# Altium PCB sumo.PcbDoc (part 1 of 2)
Units mm, origin at the board's own origin, x right, y up, seen from the top; angles counter-clockwise.
Board outline 100 x 100 mm, 2 copper layers (Top Layer, Bottom Layer); 167 components, 120 nets, 498 pads, 1066 vias.
Unrouted connection lines stored in the file: 60.
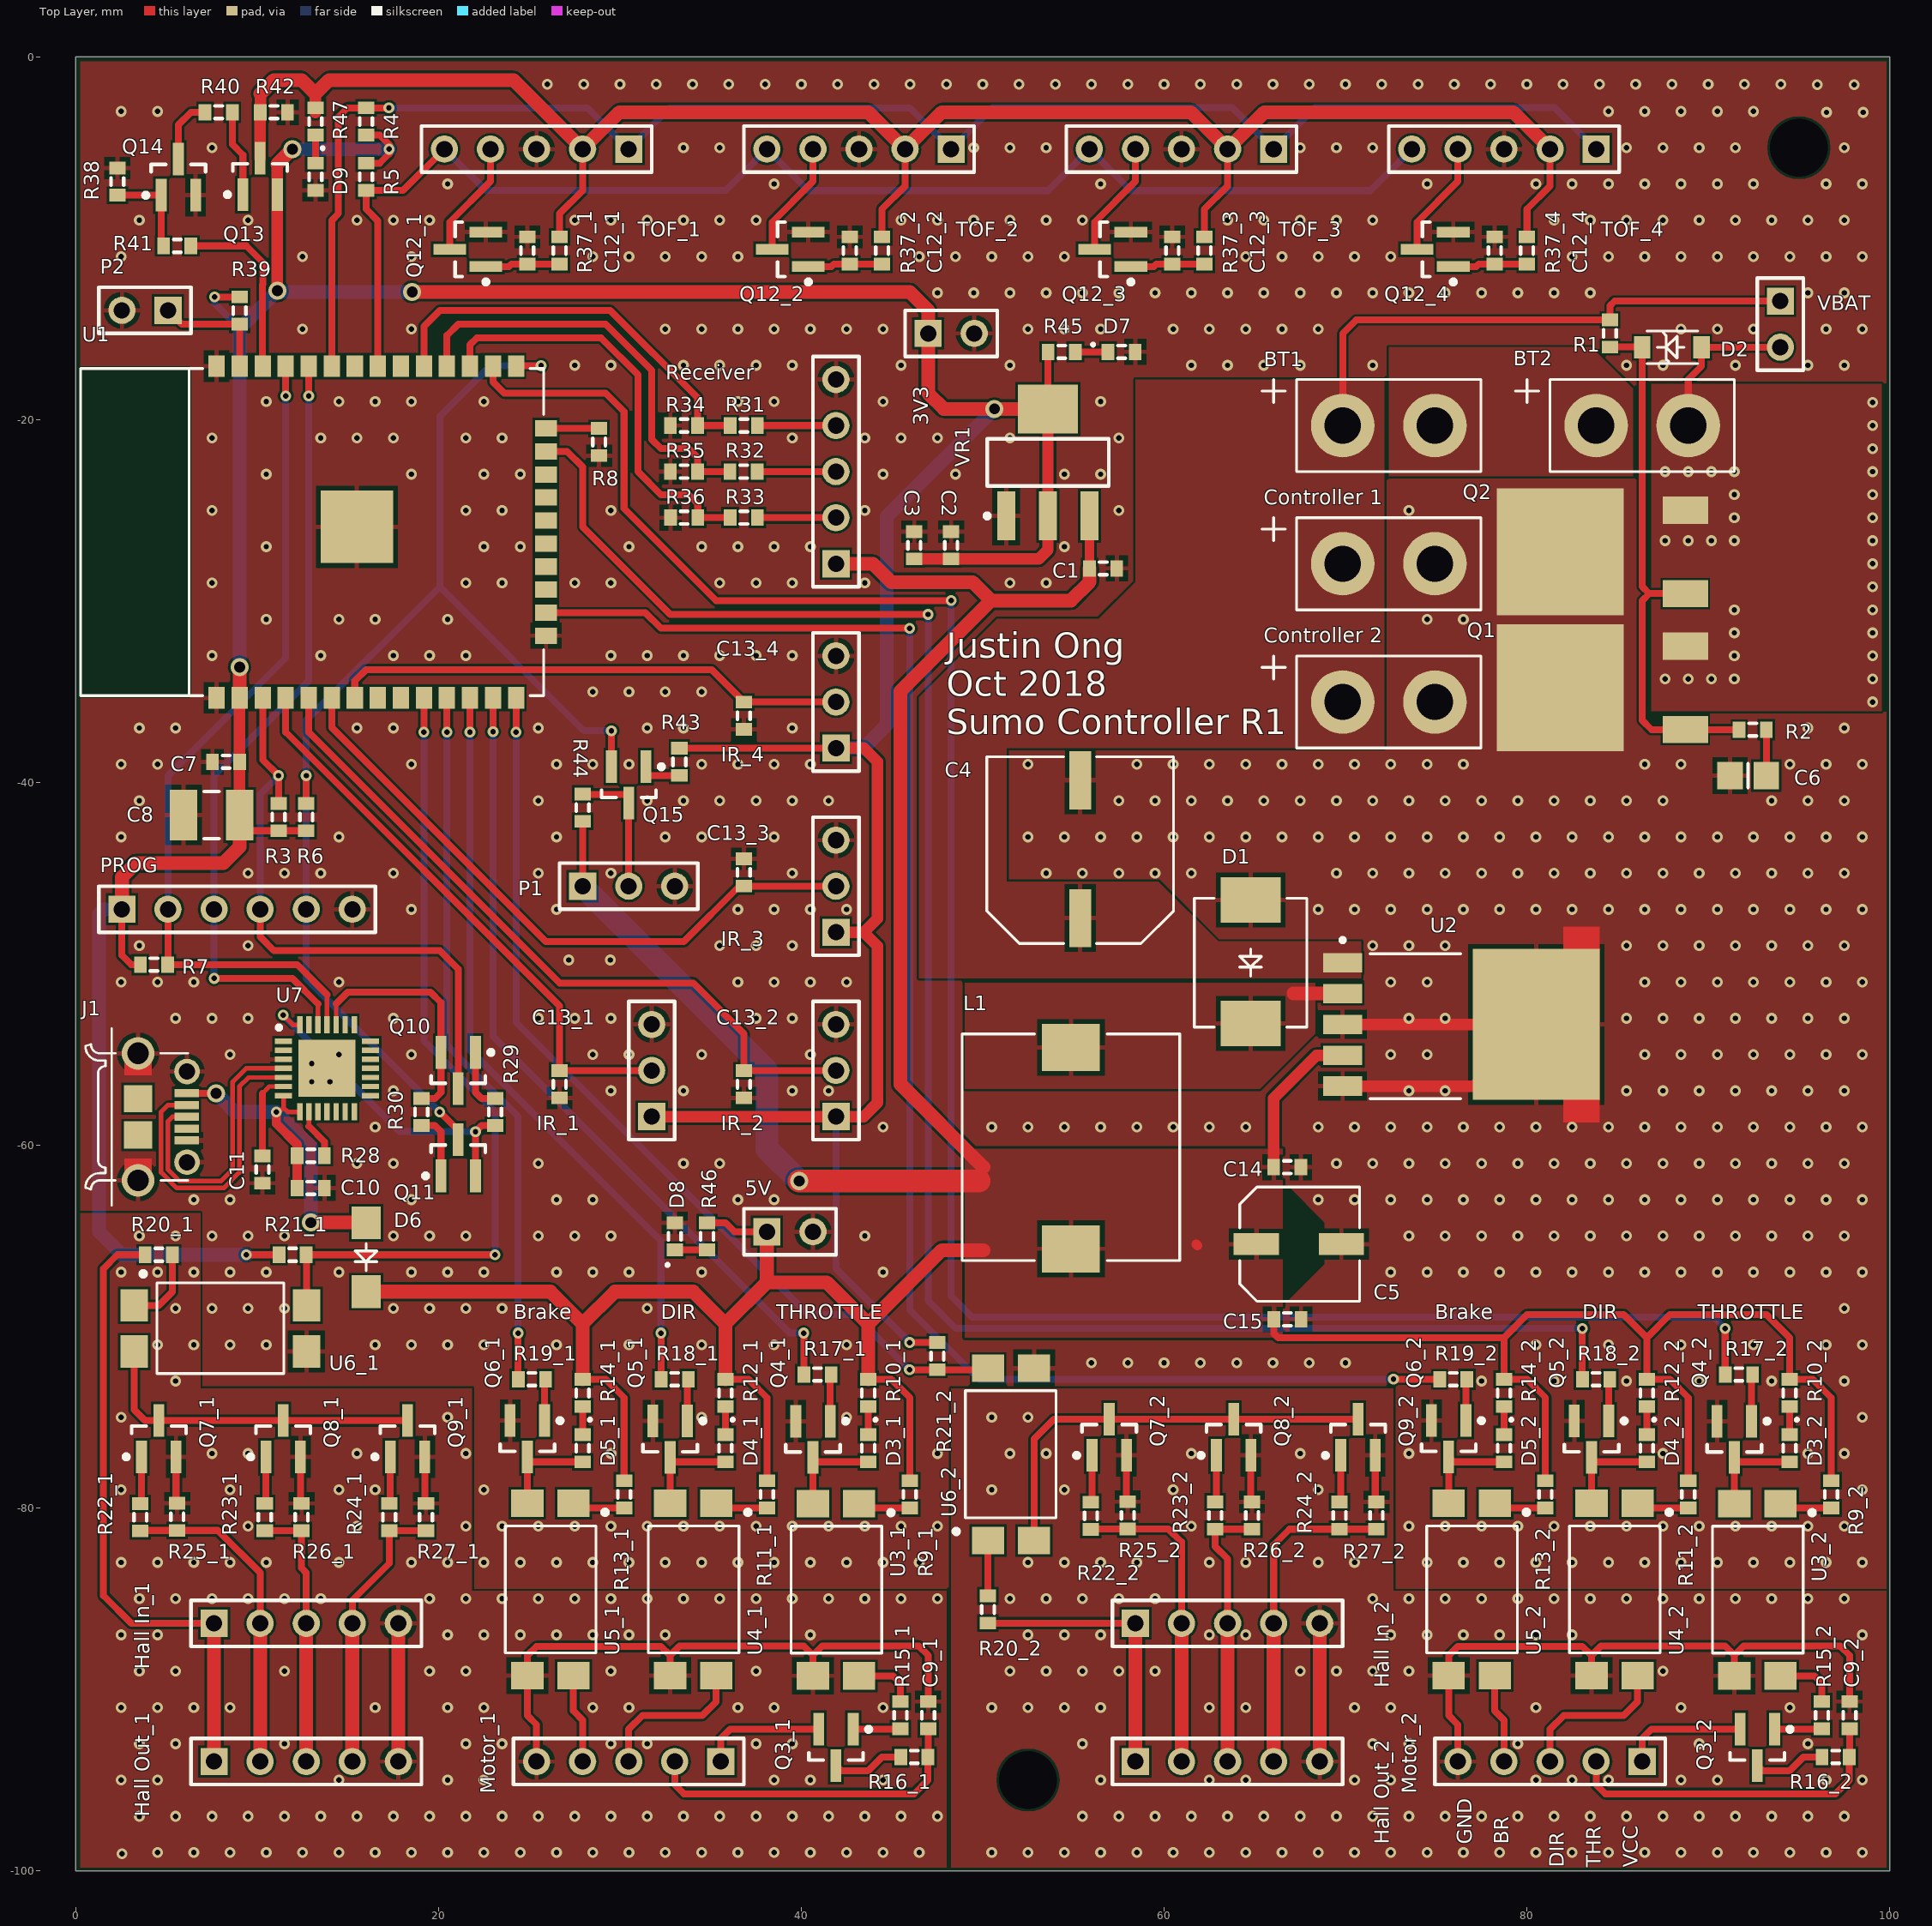
[diagram p0: Top Layer view]
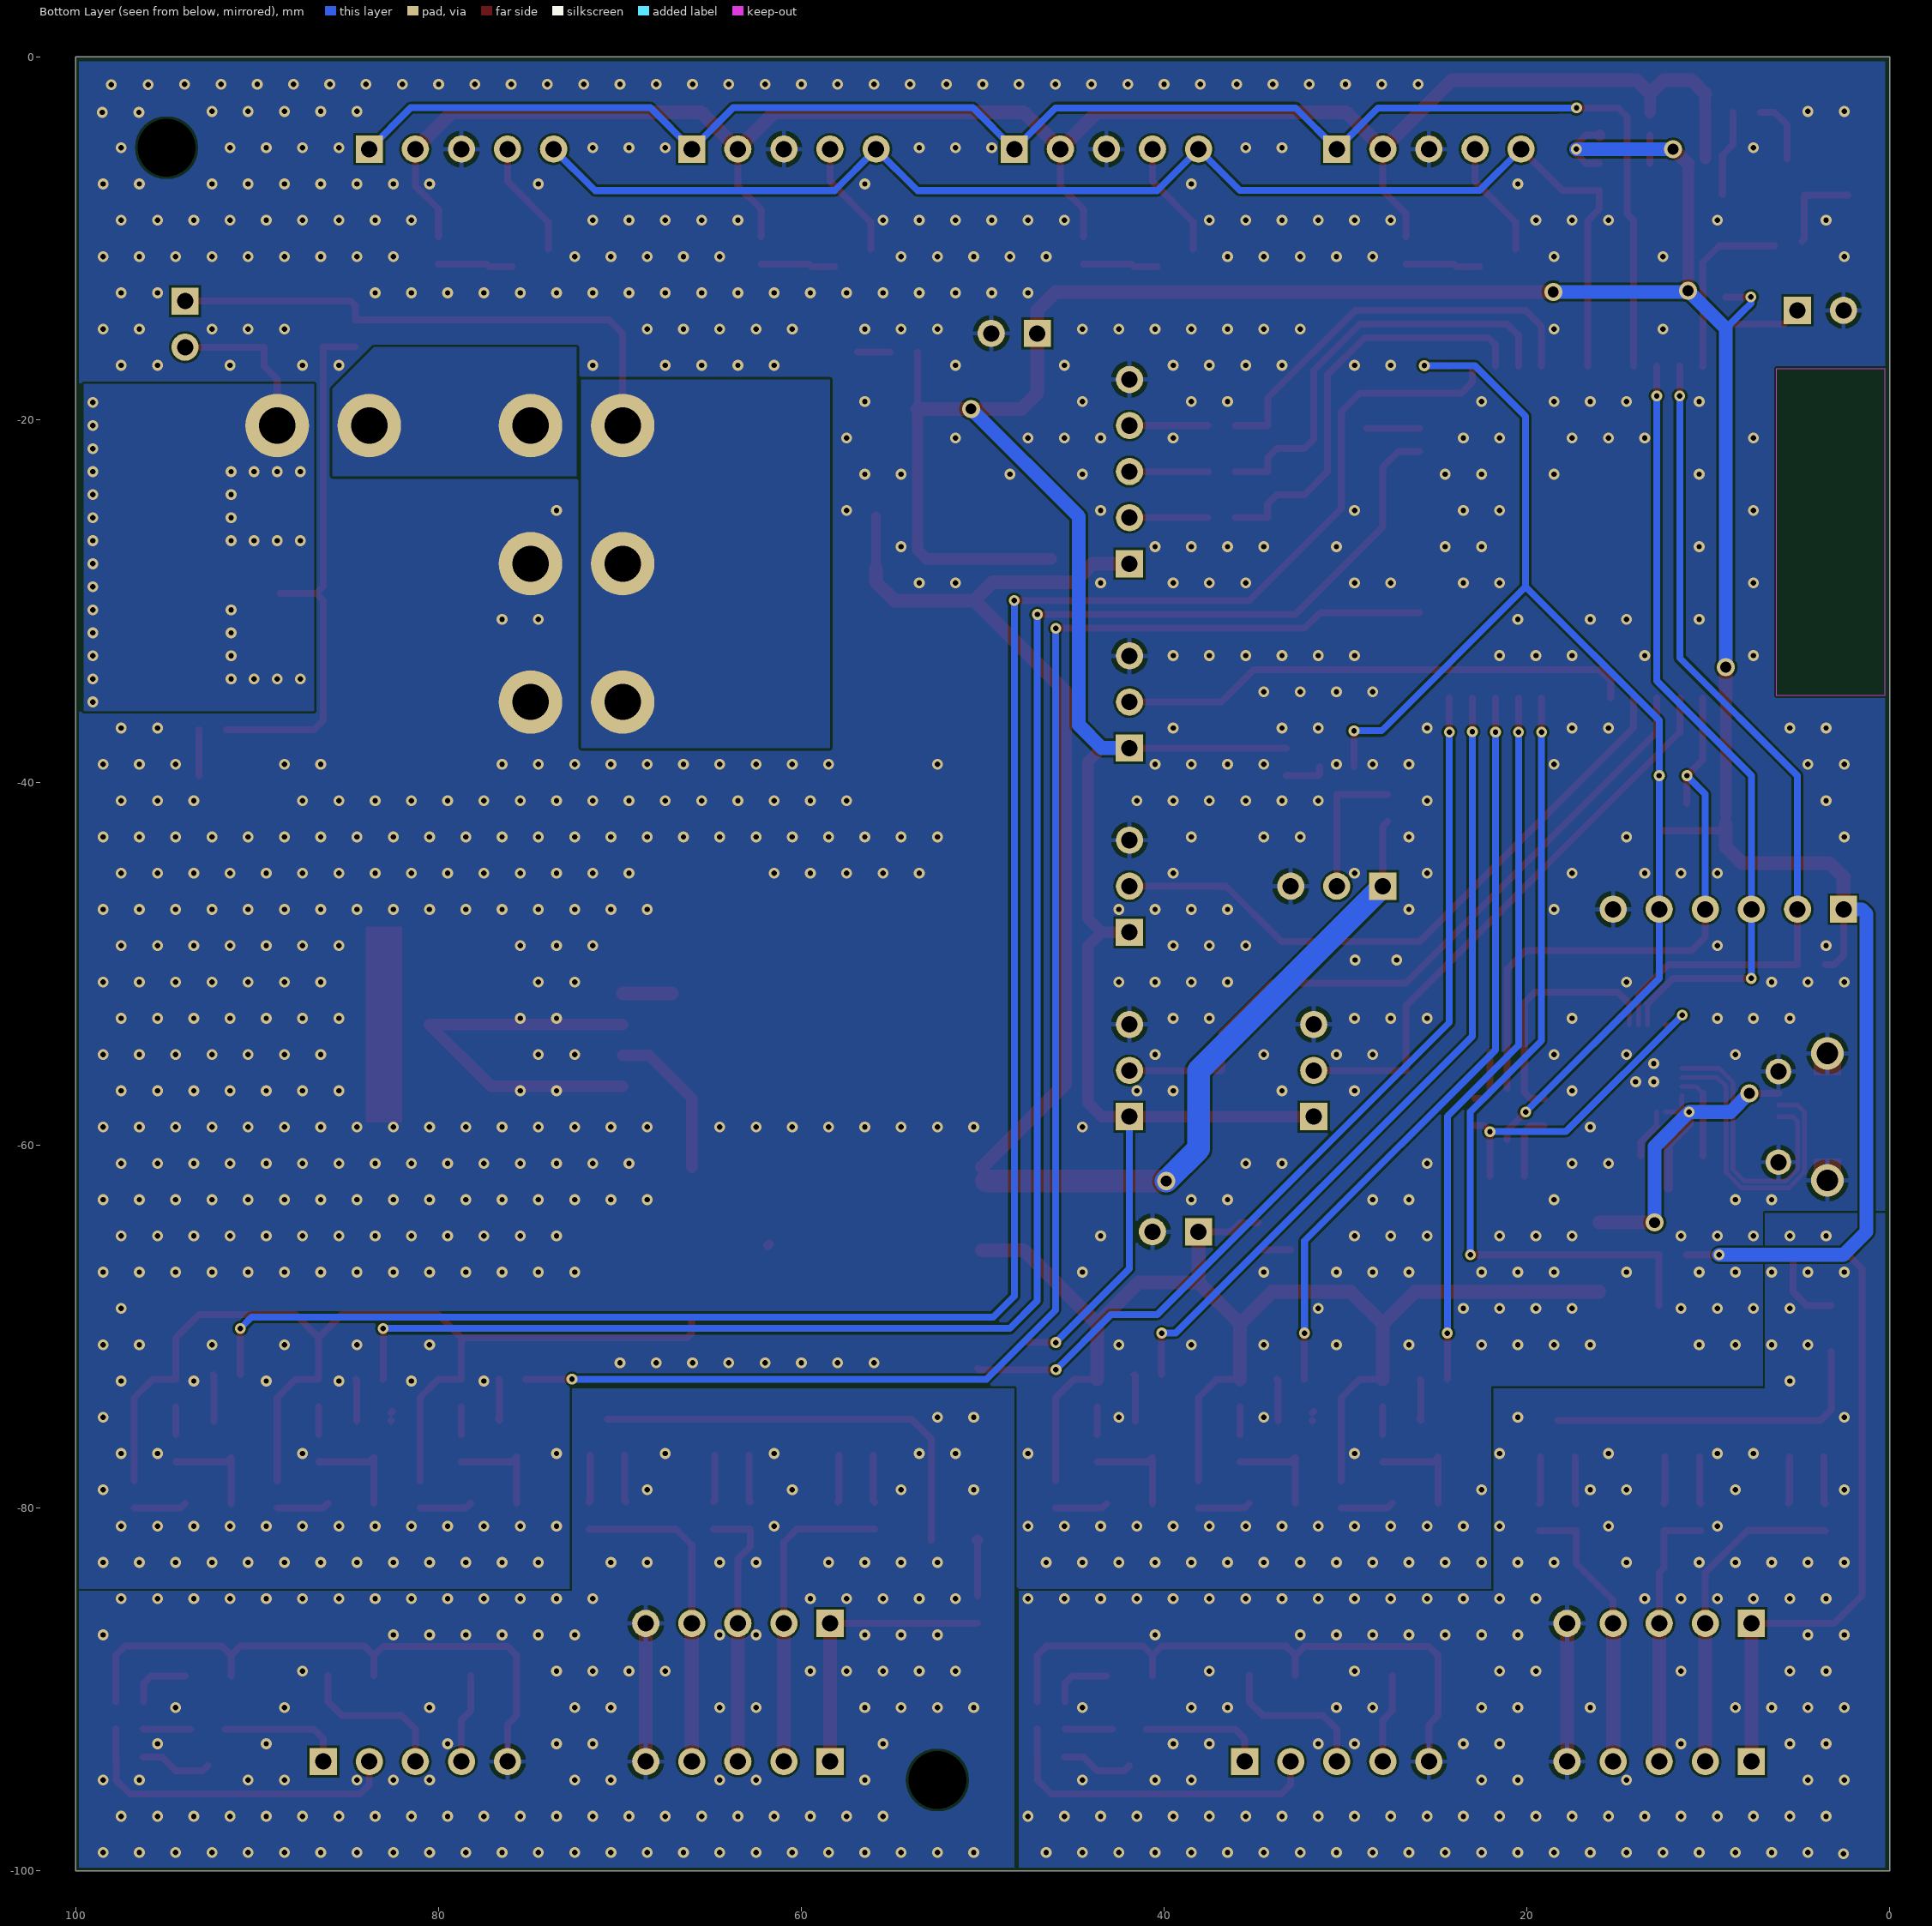
[diagram p1: Bottom Layer view, seen from below]

## Layer stack, top to bottom
Top Solder: solder mask 0.0102, Solder Resist, Dk 3.5
Top Layer: signal copper 0.0356
Dielectric 1: dielectric 0.32, FR-4, Dk 4.8
Bottom Layer: signal copper 0.0356
Bottom Solder: solder mask 0.0102, Solder Resist, Dk 3.5

## Board outline
0,-100 100,-100 100,0 0,0

## Design rules (kind name [scope] priority, off if disabled: settings)
Clearance [All] p1: gap=0.127 ignorepadtopadclearanceinfootprint=FALSE
PlaneConnect [All] p1: planeconnectstyle=Relief reliefexpansion=0.508 reliefentries=4 reliefconductorwidth=0.508 reliefairgap=0.254
PolygonConnect PolygonConnect_Ignore_Stitching [IsStitchingVia OR (IsVia AND InNet('GND_1'))] p1: connectstyle=Direct reliefconductorwidth=0.254 reliefentries=4 polygonreliefangle="90 Angle" airgapwidth=0.254
PolygonConnect PolygonConnect_Direct_Pads [(InComponent('BT1') OR InComponent('BT2') OR InComponent('Controller 1') OR InComponent('Controller 2') OR InComponent('Q1') OR InComponent('Q2') OR InNet('NetBT2_2') OR (InNet('VBAT') AND NOT InComponent('C4'))) vs NOT InComponent('C4')] p2: connectstyle=Direct reliefconductorwidth=0.508 reliefentries=4 polygonreliefangle="90 Angle" airgapwidth=0.254
PolygonConnect PolygonConnect_1 [All] p3: connectstyle=Relief reliefconductorwidth=0.254 reliefentries=4 polygonreliefangle="90 Angle" airgapwidth=0.254
RoomDefinition IR4 [InComponentClass('IR4')] p1: confinementstyle=ConfineIn formatcopy=TRUE lockcomponents=FALSE outline 34.29,-40.64 44.45,-40.64 44.45,-30.48 34.29,-30.48
RoomDefinition IR3 [InComponentClass('IR3')] p2: confinementstyle=ConfineIn formatcopy=TRUE lockcomponents=FALSE outline 34.29,-50.8 44.45,-50.8 44.45,-40.64 34.29,-40.64
RoomDefinition IR2 [InComponentClass('IR2')] p3: confinementstyle=ConfineIn formatcopy=TRUE lockcomponents=FALSE outline 34.29,-60.96 44.45,-60.96 44.45,-50.8 34.29,-50.8
RoomDefinition IR1 [InComponentClass('IR1')] p4: confinementstyle=ConfineIn formatcopy=TRUE lockcomponents=FALSE outline 24.13,-60.96 34.29,-60.96 34.29,-50.8 24.13,-50.8
RoomDefinition "WS2812B Driver" [InComponentClass('WS2812B Driver')] p5: confinementstyle=ConfineIn formatcopy=TRUE lockcomponents=FALSE outline 35.56,-35.56 25.4,-35.56 25.4,-48.26 35.56,-48.26
RoomDefinition VL53L0X_D [InComponentClass('VL53L0X_D')] p6: confinementstyle=ConfineIn formatcopy=TRUE lockcomponents=FALSE outline 86.36,-15.24 86.36,-2.54 71.12,-2.54 71.12,-15.24
RoomDefinition VL53L0X_C [InComponentClass('VL53L0X_C')] p7: confinementstyle=ConfineIn formatcopy=TRUE lockcomponents=FALSE outline 68.58,-15.24 68.58,-2.54 53.34,-2.54 53.34,-15.24
RoomDefinition VL53L0X_B [InComponentClass('VL53L0X_B')] p8: confinementstyle=ConfineIn formatcopy=TRUE lockcomponents=FALSE outline 50.8,-15.24 50.8,-2.54 35.56,-2.54 35.56,-15.24
RoomDefinition VL53L0X_A [InComponentClass('VL53L0X_A')] p9: confinementstyle=ConfineIn formatcopy=TRUE lockcomponents=FALSE outline 33.02,-15.24 33.02,-2.54 17.78,-2.54 17.78,-15.24
RoomDefinition "TOF Sensor Control" [InComponentClass('TOF Sensor Control')] p10: confinementstyle=ConfineIn formatcopy=TRUE lockcomponents=FALSE outline 0,-11.43 17.78,-11.43 17.78,0 0,0
RoomDefinition Receiver [InComponentClass('Receiver')] p11: confinementstyle=ConfineIn formatcopy=TRUE lockcomponents=FALSE outline 30.48,-30.48 44.45,-30.48 44.45,-15.24 30.48,-15.24
RoomDefinition Programming [InComponentClass('Programming')] p12: confinementstyle=ConfineIn formatcopy=TRUE lockcomponents=FALSE outline 0.064,-70.612 25.4,-70.612 25.4,-50.927 0.064,-50.927
RoomDefinition "Motor 2" [InComponentClass('Motor 2')] p13: confinementstyle=ConfineIn formatcopy=TRUE lockcomponents=FALSE outline 44.45,-99.06 99.06,-99.06 99.06,-63.5 44.45,-63.5
RoomDefinition "Motor 1" [InComponentClass('Motor 1')] p14: confinementstyle=ConfineIn formatcopy=TRUE lockcomponents=FALSE outline 0,-99.06 48.26,-99.06 48.26,-63.5 0,-63.5
RoomDefinition ESP32 [InComponentClass('ESP32')] p15: confinementstyle=ConfineIn formatcopy=TRUE lockcomponents=FALSE outline -0.054,-50.673 31.242,-50.673 31.242,0 -0.054,0
RoomDefinition BatteryStepDownHV [InComponentClass('BatteryStepDownHV')] p16: confinementstyle=ConfineIn formatcopy=TRUE lockcomponents=FALSE outline 31.496,-73.152 99.568,-73.152 99.568,-10.922 31.496,-10.922
RoomDefinition "3V3 Step Down" [InComponentClass('3V3 Step Down')] p17: confinementstyle=ConfineIn formatcopy=TRUE lockcomponents=FALSE outline 44.45,-29.464 62.23,-29.464 62.23,-12.954 44.45,-12.954
RoutingVias [All] p1: holewidth=0.2 width=0.6 viastyle="Through Hole" minholewidth=0.2 minwidth=0.6 maxholewidth=1 maxwidth=2
SolderMaskExpansion [All] p1: expansion=0.102
Width [All] p1: maxlimit=25.4 minlimit=0.254 preferedwidth=0.381
29 further rules are at their usual default settings.

## Classes and differential pairs
channel class IR: IR1 IR2 IR3 IR4
component class IR4: C13_4 IR_4
component class IR3: C13_3 IR_3
component class IR2: C13_2 IR_2
component class IR1: C13_1 IR_1
channel class TOFSensor: VL53L0X_A VL53L0X_B VL53L0X_C VL53L0X_D
channel class MotorDriver: "Motor 1" "Motor 2"
component class "WS2812B Driver": P1 Q15 R43 R44
component class VL53L0X_D: C12_4 Q12_4 R37_4 TOF_4
component class VL53L0X_C: C12_3 Q12_3 R37_3 TOF_3
component class VL53L0X_B: C12_2 Q12_2 R37_2 TOF_2
component class VL53L0X_A: C12_1 Q12_1 R37_1 TOF_1
component class "TOF Sensor Control": D9 Q13 Q14 R38 R40 R41 R42 R47
component class Receiver: R31 R32 R33 R34 R35 R36 Receiver
component class Programming: C10 C11 D6 J1 Q10 Q11 R28 R29 R30 U7
component class "Motor 2": C9_2 D3_2 D4_2 D5_2 "Hall In_2" "Hall Out_2" Motor_2 Q3_2 Q4_2 Q5_2 Q6_2 Q7_2 Q8_2 Q9_2 R9_2 R10_2 R11_2 R12_2 R13_2 R14_2 R15_2 R16_2 R17_2 R18_2 R19_2 R20_2 R21_2 R22_2 R23_2 R24_2 R25_2 R26_2 R27_2 U3_2 U4_2 U5_2 U6_2
component class "Motor 1": C9_1 D3_1 D4_1 D5_1 "Hall In_1" "Hall Out_1" Motor_1 Q3_1 Q4_1 Q5_1 Q6_1 Q7_1 Q8_1 Q9_1 R9_1 R10_1 R11_1 R12_1 R13_1 R14_1 R15_1 R16_1 R17_1 R18_1 R19_1 R20_1 R21_1 R22_1 R23_1 R24_1 R25_1 R26_1 R27_1 U3_1 U4_1 U5_1 U6_1
component class ESP32: C7 C8 P2 PROG R3 R4 R5 R6 R7 R8 R39 U1
component class BatteryStepDownHV: 5V BT1 BT2 C4 C5 C6 C14 C15 "Controller 1" "Controller 2" D1 D2 D8 L1 Q1 Q2 R1 R2 R46 U2 VBAT
component class "3V3 Step Down": 3V3 C1 C2 C3 D7 R45 VR1

## Components (designator, comment, footprint, x,y, rotation, side; value= is the part's Value field where it differs from the comment)
3V3 "Header 2" HDR1X2 46.99,-15.24 r0 top
5V "Header 2" HDR1X2 38.1,-64.77 r0 top
BT1 "6S Li-Po" "Wire Terminals" 69.85,-20.32 r0 top
BT2 "6S Li-Po" "Wire Terminals" 83.82,-20.32 r0 top
C1 "Cap" J1-0603 56.642,-28.194 r0 top value=22uF
C2 "Cap" J1-0603 48.26,-26.924 r270 top value=100nF
C3 "Cap" J1-0603 46.228,-26.924 r90 top value=22uF
C4 "Cap Pol1" 10x10.5 55.372,-47.478 r90 top value=100uF
C5 "Cap Pol1" 6.3X5.4 65.074,-65.456 r0 top value=220uF
C6 "Cap" 6-0805_M 92.202,-39.624 r0 top value=1uF
C7 "Cap" J1-0603 8.28,-38.862 r0 top value=100nF
C8 "Cap" C1210_M 7.48,-41.796 r0 top value=100uF
C9_1 "Cap" J1-0603 46.99,-91.424 r270 top value=100nF (schematic designator C9)
C9_2 "Cap" J1-0603 97.79,-91.424 r270 top value=100nF (schematic designator C9)
C10 "Cap" J1-0603 12.954,-62.357 r180 top value=100nF
C11 "Cap" J1-0603 10.287,-61.341 r90 top value=100nF
C12_1 "Cap" J1-0603 26.67,-10.668 r270 top value=22uF (schematic designator C12)
C12_2 "Cap" J1-0603 44.45,-10.668 r270 top value=22uF (schematic designator C12)
C12_3 "Cap" J1-0603 62.23,-10.668 r270 top value=22uF (schematic designator C12)
C12_4 "Cap" J1-0603 80.01,-10.668 r270 top value=22uF (schematic designator C12)
C13_1 "Cap" J1-0603 26.67,-56.642 r90 top value=100nF (schematic designator C13)
C13_2 "Cap" J1-0603 36.83,-56.642 r90 top value=100nF (schematic designator C13)
C13_3 "Cap" J1-0603 36.83,-44.958 r270 top value=100nF (schematic designator C13)
C13_4 "Cap" J1-0603 36.83,-36.322 r90 top value=100nF (schematic designator C13)
C14 "Cap" J1-0603 66.79,-61.214 r180 top value=100nF
C15 "Cap" J1-0603 66.802,-69.596 r180 top value=100nF
"Controller 1" "Header 2" "Wire Terminals" 69.85,-27.94 r0 top
"Controller 2" "Header 2" "Wire Terminals" 69.85,-35.56 r0 top
D1 "B390-13-F" B390 64.77,-46.482 r270 top
D2 "BZT52B12" SOD-123 89.63,-16.002 r180 top
D3_1 "LED" "J1-0603 LED" 43.688,-76.708 r270 top (schematic designator D3)
D3_2 "LED" "J1-0603 LED" 94.488,-76.708 r270 top (schematic designator D3)
D4_1 "LED" "J1-0603 LED" 35.814,-76.708 r270 top (schematic designator D4)
D4_2 "LED" "J1-0603 LED" 86.614,-76.708 r270 top (schematic designator D4)
D5_1 "LED" "J1-0603 LED" 27.94,-76.708 r270 top (schematic designator D5)
D5_2 "LED" "J1-0603 LED" 78.74,-76.708 r270 top (schematic designator D5)
D6 "SS14F" SS14 16.002,-64.272 r270 top
D7 "LED" "J1-0603 LED" 57.658,-16.256 r0 top
D8 "LED" "J1-0603 LED" 33.02,-65.024 r90 top
D9 "LED" "J1-0603 LED" 13.208,-6.604 r270 top
"Hall In_1" "Motor 1" HDR1X5 7.62,-86.36 r0 top (schematic designator "Hall In")
"Hall In_2" "Motor 1" HDR1X5 58.42,-86.36 r0 top (schematic designator "Hall In")
"Hall Out_1" "Motor 1" HDR1X5 7.62,-93.98 r0 top (schematic designator "Hall Out")
"Hall Out_2" "Motor 1" HDR1X5 58.42,-93.98 r0 top (schematic designator "Hall Out")
IR_1 "Header 3" HDR1X3 31.75,-58.42 r90 top (schematic designator IR)
IR_2 "Header 3" HDR1X3 41.91,-58.42 r90 top (schematic designator IR)
IR_3 "Header 3" HDR1X3 41.91,-48.26 r90 top (schematic designator IR)
IR_4 "Header 3" HDR1X3 41.91,-38.1 r90 top (schematic designator IR)
J1 "10118194-0001LF" 10103594-0001LF 3.429,-58.436 r270 top
L1 "Inductor" SLF12575 54.864,-54.61 r270 top value=100uH
Motor_1 "Motor 1" HDR1X5 35.56,-93.98 r180 top (schematic designator Motor)
Motor_2 "Motor 1" HDR1X5 86.36,-93.98 r180 top (schematic designator Motor)
P1 "Header 3" HDR1X3 27.94,-45.72 r0 top
P2 "Header 2" HDR1X2 5.08,-13.97 r180 top
PROG "Header 6" HDR1X6 2.54,-46.99 r0 top
Q1 "HD60N75" TO-252 88.74,-37.084 r90 top
Q2 "HD60N75" TO-252 88.74,-29.584 r90 top
Q3_1 "S8550" SOT23-3M 41.91,-93.202 r270 top (schematic designator Q3)
Q3_2 "S8550" SOT23-3M 92.71,-93.202 r270 top (schematic designator Q3)
Q4_1 "S8050" SOT23-3M 40.64,-76.216 r270 top (schematic designator Q4)
Q4_2 "S8050" SOT23-3M 91.44,-76.216 r270 top (schematic designator Q4)
Q5_1 "S8050" SOT23-3M 32.766,-76.2 r270 top (schematic designator Q5)
Q5_2 "S8050" SOT23-3M 83.566,-76.2 r270 top (schematic designator Q5)
Q6_1 "S8050" SOT23-3M 24.892,-76.184 r270 top (schematic designator Q6)
Q6_2 "S8050" SOT23-3M 75.692,-76.184 r270 top (schematic designator Q6)
Q7_1 "BSS138" SOT23-3M 4.572,-76.184 r90 top (schematic designator Q7)
Q7_2 "BSS138" SOT23-3M 56.977,-76.1 r90 top (schematic designator Q7)
Q8_1 "BSS138" SOT23-3M 11.43,-76.184 r90 top (schematic designator Q8)
Q8_2 "BSS138" SOT23-3M 63.835,-76.1 r90 top (schematic designator Q8)
Q9_1 "BSS138" SOT23-3M 18.288,-76.184 r90 top (schematic designator Q9)
Q9_2 "BSS138" SOT23-3M 70.693,-76.1 r90 top (schematic designator Q9)
Q10 "S8050" SOT23-3M 21.082,-55.88 r270 top
Q11 "S8050" SOT23-3M 21.082,-60.69 r90 top
Q12_1 "S8050" SOT23-3M 21.606,-10.602 r180 top (schematic designator Q12)
Q12_2 "S8050" SOT23-3M 39.386,-10.602 r180 top (schematic designator Q12)
Q12_3 "S8050" SOT23-3M 57.166,-10.602 r180 top (schematic designator Q12)
Q12_4 "S8050" SOT23-3M 74.946,-10.602 r180 top (schematic designator Q12)
Q13 "S8550" SOT23-3M 10.16,-6.588 r90 top
Q14 "S8050" SOT23-3M 5.654,-6.62 r90 top
Q15 "S8050" SOT23-3M 30.48,-40.132 r270 top
R1 "Res1" J1-0603 84.582,-15.24 r90 top value=1M
R2 "Res1" J1-0603 92.456,-37.084 r0 top value=1k
R3 "Res1" J1-0603 11.176,-41.91 r270 top value=10k
R4 "Res1" J1-0603 16.002,-3.556 r270 top value=10k
R5 "Res1" J1-0603 16.002,-6.604 r90 top value=10k
R6 "Res1" J1-0603 12.7,-41.91 r270 top value=10k
R7 "Res1" J1-0603 4.306,-50.038 r180 top value=10k
R8 "Res1" J1-0603 28.848,-21.228 r90 top value=10k
R9_1 "Res1" J1-0603 45.974,-79.248 r90 top value=1k (schematic designator R9)
R9_2 "Res1" J1-0603 96.774,-79.248 r90 top value=1k (schematic designator R9)
R10_1 "Res1" J1-0603 43.688,-73.66 r90 top value=1k (schematic designator R10)
R10_2 "Res1" J1-0603 94.488,-73.66 r90 top value=1k (schematic designator R10)
R11_1 "Res1" J1-0603 38.1,-79.248 r90 top value=1k (schematic designator R11)
R11_2 "Res1" J1-0603 88.9,-79.248 r90 top value=1k (schematic designator R11)
R12_1 "Res1" J1-0603 35.814,-73.66 r90 top value=1k (schematic designator R12)
R12_2 "Res1" J1-0603 86.614,-73.66 r90 top value=1k (schematic designator R12)
R13_1 "Res1" J1-0603 30.226,-79.248 r90 top value=1k (schematic designator R13)
R13_2 "Res1" J1-0603 81.026,-79.248 r90 top value=1k (schematic designator R13)
R14_1 "Res1" J1-0603 27.94,-73.66 r90 top value=1k (schematic designator R14)
R14_2 "Res1" J1-0603 78.74,-73.66 r90 top value=1k (schematic designator R14)
R15_1 "Res1" J1-0603 45.466,-91.424 r270 top value=10k (schematic designator R15)
R15_2 "Res1" J1-0603 96.266,-91.424 r270 top value=10k (schematic designator R15)
R16_1 "Res1" J1-0603 46.228,-93.726 r180 top value=10k (schematic designator R16)
R16_2 "Res1" J1-0603 97.028,-93.726 r180 top value=10k (schematic designator R16)
R17_1 "Res1" J1-0603 40.894,-72.644 r0 top value=1k (schematic designator R17)
R17_2 "Res1" J1-0603 91.694,-72.644 r0 top value=1k (schematic designator R17)
R18_1 "Res1" J1-0603 33.02,-72.898 r0 top value=1k (schematic designator R18)
R18_2 "Res1" J1-0603 83.82,-72.898 r0 top value=1k (schematic designator R18)
R19_1 "Res1" J1-0603 25.146,-72.898 r0 top value=1k (schematic designator R19)
R19_2 "Res1" J1-0603 75.946,-72.898 r0 top value=1k (schematic designator R19)
R20_1 "Res1" J1-0603 4.572,-66.04 r180 top value=1k (schematic designator R20)
R20_2 "Res1" J1-0603 50.292,-85.598 r270 top value=1k (schematic designator R20)
R21_1 "Res1" J1-0603 11.95,-66.04 r180 top value=1k (schematic designator R21)
R21_2 "Res1" J1-0603 47.498,-71.628 r90 top value=1k (schematic designator R21)
R22_1 "Res1" J1-0603 3.556,-80.514 r270 top value=47 (schematic designator R22)
R22_2 "Res1" J1-0603 55.961,-80.43 r270 top value=47 (schematic designator R22)
R23_1 "Res1" J1-0603 10.414,-80.502 r270 top value=47 (schematic designator R23)
R23_2 "Res1" J1-0603 62.819,-80.418 r270 top value=47 (schematic designator R23)
R24_1 "Res1" J1-0603 17.272,-80.502 r270 top value=47 (schematic designator R24)
R24_2 "Res1" J1-0603 69.677,-80.418 r270 top value=47 (schematic designator R24)
R25_1 "Res1" J1-0603 5.588,-80.49 r270 top value=47k (schematic designator R25)
R25_2 "Res1" J1-0603 57.993,-80.406 r270 top value=47k (schematic designator R25)
R26_1 "Res1" J1-0603 12.446,-80.502 r270 top value=47k (schematic designator R26)
R26_2 "Res1" J1-0603 64.851,-80.418 r270 top value=47k (schematic designator R26)
R27_1 "Res1" J1-0603 19.304,-80.502 r270 top value=47k (schematic designator R27)
R27_2 "Res1" J1-0603 71.709,-80.418 r270 top value=47k (schematic designator R27)
R28 "Res1" J1-0603 12.954,-60.579 r180 top value=10k
R29 "Res1" J1-0603 23.114,-58.166 r90 top value=10k
R30 "Res1" J1-0603 19.05,-58.166 r270 top value=10k
R31 "Res1" J1-0603 36.83,-20.32 r0 top value=10k
R32 "Res1" J1-0603 36.818,-22.86 r0 top value=10k
R33 "Res1" J1-0603 36.83,-25.4 r0 top value=10k
R34 "Res1" J1-0603 33.528,-20.32 r0 top value=22k
R35 "Res1" J1-0603 33.528,-22.86 r0 top value=22k
R36 "Res1" J1-0603 33.54,-25.4 r0 top value=22k
R37_1 "Res1" J1-0603 24.892,-10.668 r270 top value=RC_VALUE (schematic designator R37)
R37_2 "Res1" J1-0603 42.672,-10.668 r270 top value=RC_VALUE (schematic designator R37)
R37_3 "Res1" J1-0603 60.452,-10.668 r270 top value=RC_VALUE (schematic designator R37)
R37_4 "Res1" J1-0603 78.232,-10.668 r270 top value=RC_VALUE (schematic designator R37)
R38 "Res1" J1-0603 2.286,-6.87 r90 top value=10k
R39 "Res1" J1-0603 9.03,-13.982 r90 top value=10k
R40 "Res1" J1-0603 7.874,-3.048 r180 top value=1k
R41 "Res1" J1-0603 5.588,-10.414 r0 top value=10k
R42 "Res1" J1-0603 10.922,-3.048 r180 top value=1k
R43 "Res1" J1-0603 33.274,-38.862 r90 top value=10k
R44 "Res1" J1-0603 27.94,-41.39 r270 top value=10k
R45 "Res1" J1-0603 54.356,-16.256 r180 top value=1k
R46 "Res1" J1-0603 34.798,-65.024 r90 top value=1k
R47 "Res1" J1-0603 13.208,-3.556 r90 top value=1k
Receiver "" HDR1X5 41.91,-27.94 r90 top
TOF_1 "GY-530 Module" HDR1X5 30.48,-5.08 r180 top (schematic designator TOF)
TOF_2 "GY-530 Module" HDR1X5 48.26,-5.08 r180 top (schematic designator TOF)
TOF_3 "GY-530 Module" HDR1X5 66.04,-5.08 r180 top (schematic designator TOF)
TOF_4 "GY-530 Module" HDR1X5 83.82,-5.08 r180 top (schematic designator TOF)
U1 "ESP32-WROOM-32" ESP32-WROOM-32 25.794,-35.208 r90 top locked
U2 "LM2576HVS-5.0" KTT0005B 69.843,-49.94 r180 top
U3_1 "ORPC-817S" SMD-4 43.18,-79.756 r270 top (schematic designator U3)
U3_2 "ORPC-817S" SMD-4 93.98,-79.756 r270 top (schematic designator U3)
U4_1 "ORPC-817S" SMD-4 35.306,-79.74 r270 top (schematic designator U4)
U4_2 "ORPC-817S" SMD-4 86.106,-79.74 r270 top (schematic designator U4)
U5_1 "ORPC-817S" SMD-4 27.432,-79.74 r270 top (schematic designator U5)
U5_2 "ORPC-817S" SMD-4 78.232,-79.74 r270 top (schematic designator U5)
U6_1 "ORPC-817S" SMD-4 3.216,-68.834 r0 top (schematic designator U6)
U6_2 "ORPC-817S" SMD-4 50.292,-81.788 r90 top (schematic designator U6)
U7 "CP2102" QFN-28 11.449,-54.264 r0 top
VBAT "Header 2" HDR1X2 93.98,-13.462 r270 top
VR1 "AMS1117-3.3" SOT223-4M 53.594,-22.352 r90 top

## Footprints (in the part's own frame and the unit in brackets; to place one, negate y for a bottom-side part, rotate by r counter-clockwise, add the part's x,y. Pads: shape width x height; smd on the part's side, far side on the other; paste and mask are expansions set on the pad)
6-0805_M [mm] "Chip Resistor, Body 2.0x1.2mm, IPC Low Density"
  rect 1.4x1.5 smd: 1(-1,0) 2(1,0)
  silkscreen extent 0,-0.65 0,0.65, body extent -1.07,-0.7 1.07,0.7, height 0.7
6.3X5.4 [mm] "SMD Aluminium Electrolytic Capacitor"
  rect 2.5x1.2 smd: 1(0,0) 2(4.7,0)
  silkscreen extent -0.9,-3.15 5.7,3.15
10x10.5 [mm] "SMD Aluminium Electrolytic Capacitor"
  rect 3.2x1.2 smd: 1(0,0) 2(7.6,0)
  silkscreen extent -1.4,-5.15 8.9,5.15
10103594-0001LF [mm] "Amphenol FCI Right Angle SMT Type B Version 2.0 Micro USB Connector Socket, 100 V ac, 1.8A"
  rect 0.45x1.35 smd: 1(-1.3,2.675) 2(-0.65,2.675) 3(0,2.675) 4(0.65,2.675) 5(1.3,2.675)
  round 1.408 hole 0.9: 6(-2.5,2.7) 7(2.5,2.7)
  round 1.8 hole 1.2: 8(-3.5,0) 9(3.5,0)
  rect 1.5x1.55 smd: P$10(-1,0) P$11(1,0)
  Top Layer region: 2.286,-0.762 3.81,-0.762 3.81,0.762 2.286,0.762
  Top Layer region: -3.81,-0.762 -2.286,-0.762 -2.286,0.762 -3.81,0.762
  silkscreen extent -4.87,-2.9 4.88,2.75
B390 [mm] "3A 90V Schotkky Diode"
  rect 2.5x3.3 smd: 1(0,0) 2(6.8,0)
  silkscreen extent -0.1,-3.1 7,3.1
C1210_M [mm] "Chip Capacitor, Body 3.2x2.5mm, IPC Low Density"
  rect 1.5x2.8 smd: 1(-1.55,0) 2(1.55,0)
  silkscreen extent -0.4,-1.3 0.4,1.3, body extent -1.7,-1.35 1.7,1.35, height 1.5
ESP32-WROOM-32 [mm] "http://evertdekker.com/?p=854"
  rect 1.2x0.9 smd: 1(-0.127,18.034) 2(-0.127,16.764) 3(-0.127,15.494) 4(-0.127,14.224) 5(-0.127,12.954) 6(-0.127,11.684) 7(-0.127,10.414) 8(-0.127,9.144) 9(-0.127,7.874) 10(-0.127,6.604) 11(-0.127,5.334) 12(-0.127,4.064) 13(-0.127,2.794) 14(-0.127,1.524) 25(18.161,1.524) 26(18.161,2.794) 27(18.161,4.064) 28(18.161,5.334) 29(18.161,6.604) 30(18.161,7.874) 31(18.161,9.144) 32(18.161,10.414) 33(18.161,11.684) 34(18.161,12.954) 35(18.161,14.224) 36(18.161,15.494) 37(18.161,16.764) 38(18.161,18.034)
  rect 0.9x1.2 smd: 15(3.302,-0.127) 16(4.57,-0.127) 17(5.84,-0.127) 18(7.11,-0.127) 19(8.38,-0.127) 20(9.65,-0.127) 21(10.92,-0.127) 22(12.19,-0.127) 23(13.46,-0.127) 24(14.73,-0.127)
  rect 4x4 smd: 39(9.3,10.3)
  Keep-Out Layer region: 0,19.558 18.034,19.558 18.034,25.527 0,25.527
  silkscreen extent 0,0 18.03,25.53
HDR1X2 [mm] "Connector; Header; 2 Position"
  rect 1.5x1.5 hole 0.9: 1(0,0)
  round 1.5 hole 0.9: 2(2.54,0)
  silkscreen extent -1.27,-1.27 3.81,1.27
HDR1X3 [mm] "Connector; Header; 3 Position"
  rect 1.5x1.5 hole 0.9: 1(0,0)
  round 1.5 hole 0.9: 2(2.54,0) 3(5.08,0)
  silkscreen extent -1.27,-1.27 6.35,1.27
HDR1X5 [mm] "Connector; Header; 5 Position"
  rect 1.5x1.5 hole 0.9: 1(0,0)
  round 1.5 hole 0.9: 2(2.54,0) 3(5.08,0) 4(7.62,0) 5(10.16,0)
  silkscreen extent -1.27,-1.27 11.43,1.27
HDR1X6 [mm] "Connector; Header; 6 Position"
  rect 1.5x1.5 hole 0.9: 1(0,0)
  round 1.5 hole 0.9: 2(2.54,0) 3(5.08,0) 4(7.62,0) 5(10.16,0) 6(12.7,0)
  silkscreen extent -1.27,-1.27 13.97,1.27
J1-0603 [mm] "Chip Resistor, Body 1.6x0.8mm, IPC High Density"
  rect 0.7x0.9 smd: 1(-0.75,0) 2(0.75,0)
  silkscreen extent -0.2,-0.35 0.2,0.35, body extent -0.85,-0.48 0.85,0.48, height 0.9
"J1-0603 LED" [mm] "Chip Resistor, Body 1.6x0.8mm, IPC High Density"
  rect 0.7x0.9 smd: 1(-0.75,0) 2(0.75,0)
  silkscreen extent -1.61,-0.35 0.2,0.44, body extent -0.85,-0.48 0.85,0.48, height 0.9
KTT0005B [mm]
  rect 2.16x1.07 smd: 1(0,0) 2(0,1.7) 3(0,3.4) 4(0,5.1) 5(0,6.8)
  rect 6.99x8.33 smd: 6(-10.675,3.4)
  Top Layer region: -14.175,-2 -12.175,-2 -12.175,8.8 -14.175,8.8
  silkscreen extent -6.5,-1.35 0.1,7.5
QFN-28 [mm]
  rect 0.95x0.3 smd: 1(0,0) 2(0,-0.5) 3(0,-1) 4(0,-1.5) 5(0,-2) 6(0,-2.5) 7(0,-3) 15(4.8,-3) 16(4.8,-2.5) 17(4.8,-2) 18(4.8,-1.5) 19(4.8,-1) 20(4.8,-0.5) 21(4.8,0)
  rect 0.3x0.95 smd: 8(0.9,-3.9) 9(1.4,-3.9) 10(1.9,-3.9) 11(2.4,-3.9) 12(2.9,-3.9) 13(3.4,-3.9) 14(3.9,-3.9) 22(3.9,0.9) 23(3.4,0.9) 24(2.9,0.9) 25(2.4,0.9) 26(1.9,0.9) 27(1.4,0.9) 28(0.9,0.9)
  rect 3.15x3.15 smd: 29(2.4,-1.5)
  silkscreen extent -0.35,0.65 -0.15,0.85
SLF12575 [mm] "Inductor"
  rect 2.6x3.2 smd: 1(0,0) 2(11.1,0)
  silkscreen extent -0.75,-6 11.75,6
SMD-4 [mm]
  rect 1.52x1.78 smd: 1(0,0) 2(0,-2.54) 3(9.5,-2.54) 4(9.5,0)
  silkscreen extent 0.49,-3.75 8.25,1.76
SOD-123 [mm] "Diode"
  rect 0.91x1.22 smd: 1(0,0) 2(3.27,0)
  silkscreen extent 0.2,-0.9 3,0.9
SOT23-3M [mm] "SOT23, 3-Leads, Body 2.9x1.3mm, Pitch 0.95mm, Lead Span 2.5mm, IPC Low Density"
  rect 1.8x0.6 smd: 1(-1,0.95) 2(-1,-0.95) 3(1,0)
  silkscreen extent -1.12,-1.5 0.7,1.93, body extent -0.7,-1.5 0.7,1.5, height 1.1
SOT223-4M [mm] "SOT223, 4-Leads, Body 6.5x3.5mm, Pitch 2.3mm, Lead Span 7mm, IPC Low Density"
  rect 2.7x1 smd: 1(-2.95,2.3) 2(-2.95,0) 3(-2.95,-2.3)
  rect 2.7x3.3 smd: 4(2.95,0)
  silkscreen extent -3.07,-3.35 1.3,3.47, body extent -1.85,-3.35 1.85,3.35, height 1.8
SS14 [mm]
  rect 1.8x1.6 smd: 1(0,0) 2(3.8,0)
  silkscreen extent 1.15,-0.6 2.65,0.6
TO-252 [mm] "D-PAK"
  rect 1.5x2.5 smd: 1(0,0) 3(4.6,0)
  rect 7x7 smd: 2(2.3,6.9)
"Wire Terminals" [mm]
  round 3.5 hole 2: 1(0,0) 2(5.08,0)
  silkscreen extent -4.44,-2.54 7.62,2.54

## Part data
3V3 5V "Controller 1" "Controller 2" P2 VBAT: "Header, 2-Pin", LatestRevisionDate=17-Jul-2002, LatestRevisionNote="Re-released for DXP Platform.", Publisher="Altium Limited"
BT1 BT2: library part Battery, "Multicell Battery", LatestRevisionDate=17-Jul-2002, LatestRevisionNote="Re-released for DXP Platform.", PackageDescription="Battery; 2 Leads", PackageReference=BAT-2, Published=24-Mar-1999, Publisher="Altium Limited"
C1 C3 C12_1 C12_2 C12_3 C12_4: "Capacitor", LCSC=C109447, LatestRevisionDate=17-Jul-2002, LatestRevisionNote="Re-released for DXP Platform.", PackageDescription="Radial Cap, Thru-Hole; 2 Leads; 0.3 in Pin Spacing", PackageReference=RAD-0.3, Published=8-Jun-2000, Publisher="Altium Limited"
C2 C7 C9_1 C9_2 C10 C11 C13_1 C13_2 C13_3 C13_4 C14 C15: "Capacitor", LCSC=C153795, LatestRevisionDate=17-Jul-2002, LatestRevisionNote="Re-released for DXP Platform.", PackageDescription="Radial Cap, Thru-Hole; 2 Leads; 0.3 in Pin Spacing", PackageReference=RAD-0.3, Published=8-Jun-2000, Publisher="Altium Limited"
C4: "Polarized Capacitor (Radial)", LCSC=C59944, LatestRevisionDate=17-Jul-2002, LatestRevisionNote="Re-released for DXP Platform.", PackageDescription="Polarized Capacitor (Radial); 2 Leads", PackageReference=RB7.6-15, Published=8-Jun-2000, Publisher="Altium Limited"
C5: "Polarized Capacitor (Radial)", LCSC=C131157, LatestRevisionDate=17-Jul-2002, LatestRevisionNote="Re-released for DXP Platform.", PackageDescription="Polarized Capacitor (Radial); 2 Leads", PackageReference=RB7.6-15, Published=8-Jun-2000, Publisher="Altium Limited"
C6: "Capacitor", LCSC=C105952, LatestRevisionDate=17-Jul-2002, LatestRevisionNote="Re-released for DXP Platform.", PackageDescription="Radial Cap, Thru-Hole; 2 Leads; 0.3 in Pin Spacing", PackageReference=RAD-0.3, Published=8-Jun-2000, Publisher="Altium Limited"
C8: "Capacitor", LCSC=C92794, LatestRevisionDate=17-Jul-2002, LatestRevisionNote="Re-released for DXP Platform.", PackageDescription="Radial Cap, Thru-Hole; 2 Leads; 0.3 in Pin Spacing", PackageReference=RAD-0.3, Published=8-Jun-2000, Publisher="Altium Limited"
D1: library part "D Schottky", "Schottky Diode", LCSC=C134458, Code_JEDEC=DO-214-AA, LatestRevisionDate=17-Jul-2002, LatestRevisionNote="Re-released for DXP Platform.", PackageDescription="DO-214-AA/SMB; 2 C-Bend Leads; Body 5.3 x 3.6 mm, inc. leads (LxW)", PackageReference=SMB, Published=8-Jun-2000, Publisher="Altium Limited"
D2: library part "D Zener", "Zener Diode", LCSC=C213153, LatestRevisionDate=17-Jul-2002, LatestRevisionNote="Re-released for DXP Platform.", PackageDescription="Diode, Thru-Hole; 2 Leads; 0.7 in Pin Spacing", PackageReference=DIODE-0.7, Published=8-Jun-2000, Publisher="Altium Limited"
D3_1 D3_2 D4_1 D4_2 D5_1 D5_2 D7 D8 D9: LCSC=C205450, LatestRevisionDate=17-Jul-2002, LatestRevisionNote="Re-released for DXP Platform.", PackageDescription="SM LED; 2 Flat Leads", PackageReference=3.2X1.6X1.1, PackageVersion=Feb-2002, Published=8-Jun-2000, Publisher="Altium Limited"
D6: library part "D Schottky", "Schottky Diode", LCSC=C110213, Code_JEDEC=DO-214-AA, LatestRevisionDate=17-Jul-2002, LatestRevisionNote="Re-released for DXP Platform.", PackageDescription="DO-214-AA/SMB; 2 C-Bend Leads; Body 5.3 x 3.6 mm, inc. leads (LxW)", PackageReference=SMB, Published=8-Jun-2000, Publisher="Altium Limited"
"Hall In_1" "Hall In_2" "Hall Out_1" "Hall Out_2" Motor_1 Motor_2: library part "Header 5", "Control Signals from a E-Bike controller", LatestRevisionDate=17-Jul-2002, LatestRevisionNote="Re-released for DXP Platform.", Publisher="Altium Limited"
IR_1 IR_2 IR_3 IR_4 P1: "Header, 3-Pin", LatestRevisionDate=17-Jul-2002, LatestRevisionNote="Re-released for DXP Platform.", Publisher="Altium Limited"
J1: library part 10118194-0001LF_1, "Conn Micro USB Type B RCP 5 POS 0.65mm Solder RA SMD 5 Terminal 1 Port T/R", Package="DIP-4 FCI", Availability=Good, MF=FCI, MP=10118194-0001LF, Price="0.23 USD", RS=714-2347
L1: LCSC=C81470, Code_IEC=1005, Code_JEITA=0402, LatestRevisionDate=29-May-2009, LatestRevisionNote="IPC-7351 Footprint Added.", PackageDescription="Chip Inductor", PackageReference=0402-A, Published=8-Jun-2000, Publisher="Altium Limited"
PROG: "Header, 6-Pin", LatestRevisionDate=17-Jul-2002, LatestRevisionNote="Re-released for DXP Platform.", Publisher="Altium Limited"
Q1 Q2: "N-Channel MOSFET 75V/60A", LCSC=C216253, LatestRevisionDate=17-Jul-2002, LatestRevisionNote="Re-released for DXP Platform.", PackageDescription="TO, Flat Index; 3 In-Line, Axial Leads; Body Dia. 4.6mm; Lead Dia. 0.5 mm (max)", PackageReference=E3, PackageVersion=1995/1996, Published=8-Jun-2000, Publisher="Altium Limited"
Q3_1 Q3_2 Q13: "PNP General Purpose Amplifier", LCSC=C111271, DatasheetVersion=1997, LatestRevisionDate=15-Jan-2003, LatestRevisionNote="PCB Footprint 'BCY-W3/D4.7' replaced", PackageDescription="TO, Flat Index; 3 In-Line, Axial Leads; Body Dia. 4.5mm; Leads 0.51 x 0.48 mm (max)", PackageReference=TO-92A, PackageVersion=Sep-1998, Published=8-Jun-2000, Publisher="Altium Limited"
Q4_1 Q4_2 Q5_1 Q5_2 Q6_1 Q6_2 Q10 Q11 Q12_1 Q12_2 Q12_3 Q12_4 Q14 Q15: "NPN General Purpose Amplifier", LCSC=C259988, DatasheetVersion=1997, LatestRevisionDate=15-Jan-2003, LatestRevisionNote="PCB Footprint 'BCY-W3/D4.7' replaced", PackageDescription="TO, Flat Index; 3 In-Line, Axial Leads; Body Dia. 4.5mm; Leads 0.51 x 0.48 mm (max)", PackageReference=TO-92A, PackageVersion=Sep-1998, Published=8-Jun-2000, Publisher="Altium Limited"
Q7_1 Q7_2 Q8_1 Q8_2 Q9_1 Q9_2: "N-Channel MOSFET", LCSC=C112239, LatestRevisionDate=17-Jul-2002, LatestRevisionNote="Re-released for DXP Platform.", PackageDescription="TO, Flat Index; 3 In-Line, Axial Leads; Body Dia. 4.6mm; Lead Dia. 0.5 mm (max)", PackageReference=E3, PackageVersion=1995/1996, Published=8-Jun-2000, Publisher="Altium Limited"
R1 R2 R3 R4 R5 R6 R7 R8 R9_1 R9_2 R10_1 R10_2 R11_1 R11_2 R12_1 R12_2 R13_1 R13_2 R14_1 R14_2 R15_1 R15_2 R16_1 R16_2 R17_1 R17_2 R18_1 R18_2 R19_1 R19_2 R20_1 R20_2 R21_1 R21_2 R22_1 R22_2 R23_1 R23_2 R24_1 R24_2 R25_1 R25_2 R26_1 R26_2 R27_1 R27_2 R28 R29 R30 R31 R32 R33 R34 R35 R36 R37_1 R37_2 R37_3 R37_4 R38 R39 R40 R41 R42 R43 R44 R45 R46 R47: "Resistor", LatestRevisionDate=17-Jul-2002, LatestRevisionNote="Re-released for DXP Platform.", PackageDescription="Axial Device, Thru-Hole; 2 Leads; 0.3 in Pin Spacing", PackageReference=AXIAL-0.3, Published=8-Jun-2000, Publisher="Altium Limited"
Receiver: library part "Header 5", "Receiver Input", LatestRevisionDate=17-Jul-2002, LatestRevisionNote="Re-released for DXP Platform.", Publisher="Altium Limited"
TOF_1 TOF_2 TOF_3 TOF_4: library part "Header 5", "Header, 5-Pin", LatestRevisionDate=17-Jul-2002, LatestRevisionNote="Re-released for DXP Platform.", Publisher="Altium Limited"
U2: library part LM2576/HV, LCSC=C234209
U3_1 U3_2 U4_1 U4_2 U5_1 U5_2: "4-Pin Phototransistor Optocoupler", LCSC=C231233, DatasheetVersion=Nov-2003, LatestRevisionDate=04-Mar-2005, LatestRevisionNote="Sch pins 3 & 4 Swapped.", PackageReference=DIP-4, Published=24-Mar-1999, Publisher="Altium Limited"
U6_1 U6_2: "4-Pin Phototransistor Optocoupler", DatasheetVersion=Nov-2003, LatestRevisionDate=04-Mar-2005, LatestRevisionNote="Sch pins 3 & 4 Swapped.", PackageReference=DIP-4, Published=24-Mar-1999, Publisher="Altium Limited"
VR1: library part "Volt Reg", "Voltage Regulator", LCSC=C165482, LatestRevisionDate=29-May-2009, LatestRevisionNote="IPC-7351 Footprint Added.", PackageDescription="3-Pin Transistor Outline Package 2.54 mm Pitch, 15.1 mm Lead Span", PackageReference=D2PAK, Published=24-Mar-1999, Publisher="Altium Limited"

## Free pads (board coordinates)
  round 0 hole 3.2: 1(52.5,-95) 1(95,-5)

## Via types
v1: diameter 0.6, hole 0.3, Top Layer to Bottom Layer, tented both sides, 989 vias
v2: diameter 0.6, hole 0.3, Top Layer to Bottom Layer, 38 vias
v3: diameter 0.6, hole 0.3, Top Layer to Bottom Layer, tented top, 31 vias
v4: diameter 1, hole 0.6, Top Layer to Bottom Layer, 8 vias

## Nets (pads, with @x,y where several pads share a name; then routed paths per layer and width w, separated by ;. In a path a pad name is that pad's centre, name@x,y a point inside that pad or via, vN(x,y) a via of type N, cw(c..) or ccw(c..) an arc to the next point about the centre after c; other vN are vias at no path point)
3V3: 3V3.1 C2.2 C3.1 C7.2 C8.2 IR_1.1 IR_2.1 IR_3.1 IR_4.1 PROG.1 Q13.2 R3.2 R4.2 R5.2 R6.2 R7.2 R21_1.2 R21_2.2 R39.2 R43.2 R45.2 U1.2 VR1.2 VR1.4 | length 248.3
  Top Layer w0.381: PROG.1@2.54,-46.99 2.54,-49.53 3.048,-50.038 R7.2@3.556,-50.038 ; v2(7.644,-13.232) R39.2@9.03,-13.232 ; C8.2@9.03,-41.796 9.03,-42.304 9.386,-42.66 R3.2@11.176,-42.66 R6.2@12.7,-42.66 ; v2(9.398,-66.04) R21_1.2@11.2,-66.04 ; R5.2@16.002,-5.854 16.752,-5.854 17.272,-5.334 v2(17.272,-5.08) 17.272,-4.826 16.752,-4.306 R4.2@16.002,-4.306 ; R43.2@33.274,-38.112 41.898,-38.112 IR_4.1@41.91,-38.1 ; v2(45.974,-70.878) R21_2.2@47.498,-70.878 ; VR1.4@53.594,-19.402 53.594,-16.268 R45.2@53.606,-16.256
  Top Layer w0.635: C8.2@9.03,-41.796 C7.2@9.03,-38.862 U1.2@9.03,-35.335 ; v4(11.11,-12.888) Q13.2@11.11,-7.588 11.11,-5.908 ; IR_1.1@31.75,-58.42 IR_2.1@41.91,-58.42 43.434,-58.42 44.196,-57.658 44.196,-49.022 43.434,-48.26 ; IR_3.1@41.91,-48.26 43.434,-48.26 ; IR_4.1@41.91,-38.1 43.434,-38.1 44.196,-38.862 44.196,-47.498 43.434,-48.26 ; C3.1@46.228,-27.674 53.098,-27.674 53.594,-27.178 VR1.2@53.594,-25.302 VR1.4@53.594,-19.402
  Top Layer w0.762: PROG.1@2.54,-46.99 2.54,-45.212 3.302,-44.45 8.128,-44.45 9.03,-43.548 C8.2@9.03,-42.304 ; U1.2@9.03,-35.335 v4(9.03,-33.642) ; 11.11,-5.908 v4(11.938,-5.08) ; v4(18.542,-12.954) 45.974,-12.954 46.99,-13.97 3V3.1@46.99,-15.24 46.99,-18.542 47.85,-19.402 v4(50.644,-19.402) VR1.4@53.594,-19.402
  Bottom Layer w0.381: v2(7.644,-13.232) 7.644,-13.582 8.128,-14.066 9.03,-14.968 ; IR_2.1@41.91,-58.42 41.91,-66.814 v2(45.974,-70.878)
  Bottom Layer w0.762: PROG.1@2.54,-46.99 1.524,-46.99 1.27,-47.244 1.27,-64.77 2.54,-66.04 v2(9.398,-66.04) ; v4(9.03,-33.642) 9.03,-14.968 v4(11.11,-12.888) 11.176,-12.954 v4(18.542,-12.954) ; v4(11.938,-5.08) v2(17.272,-5.08) ; IR_4.1@41.91,-38.1 43.434,-38.1 44.704,-36.83 44.704,-25.342 v4(50.644,-19.402)
5V: 5V.1 C1.1 C5.1 C14.2 C15.2 D6.2 L1.2 P1.1 R9_1.2 R9_2.2 R10_1.2 R10_2.2 R11_1.2 R11_2.2 R12_1.2 R12_2.2 R13_1.2 R13_2.2 R14_1.2 R14_2.2 R44.2 R46.2 Receiver.1 U2.4 VR1.3 | length 234.9
  Top Layer w0.381: R44.2@27.686,-42.152 27.94,-42.406 P1.1@27.94,-45.72 ; R14_1.2@27.94,-72.91 29.222,-72.91 30.226,-73.914 R13_1.2@30.226,-78.498 ; R46.2@34.798,-64.274 35.826,-64.274 36.322,-64.77 5V.1@38.1,-64.77 ; R12_1.2@35.814,-72.91 37.096,-72.91 38.1,-73.914 R11_1.2@38.1,-78.498 ; R10_1.2@43.688,-72.91 44.97,-72.91 45.974,-73.914 R9_1.2@45.974,-78.498 ; C15.2@66.052,-69.596 66.052,-70.37 66.294,-70.612 78.74,-70.612 ; R13_2.2@81.026,-78.498 81.026,-73.914 80.022,-72.91 R14_2.2@78.74,-72.91 78.74,-70.612 ; R11_2.2@88.9,-78.498 88.9,-73.914 87.896,-72.91 R12_2.2@86.614,-72.91 86.614,-70.612 ; R9_2.2@96.774,-78.498 96.774,-73.914 95.77,-72.91 R10_2.2@94.488,-72.91 94.488,-70.612 93.218,-69.342 87.884,-69.342 86.614,-70.612 ; 78.74,-70.612 80.01,-69.342 85.344,-69.342 86.614,-70.612
  Top Layer w0.508: C1.1@55.892,-28.194 55.892,-25.304 VR1.3@55.894,-25.302 ; 61.772,-65.456 61.848,-65.532
  Top Layer w0.635: C14.2@66.04,-61.214 66.04,-57.404 68.404,-55.04 U2.4@69.843,-55.04
  Top Layer w0.762: D6.2@16.002,-68.072 26.162,-68.072 27.94,-69.85 ; R14_1.2@27.94,-72.91 27.94,-69.85 ; R12_1.2@35.814,-72.91 35.814,-69.85 ; 5V.1@38.1,-64.77 38.1,-67.564 ; Receiver.1@41.91,-27.94 43.942,-27.94 44.958,-28.956 49.438,-28.956 50.454,-29.972 ; R10_1.2@43.688,-72.91 43.688,-69.85 ; 50.038,-65.786 47.752,-65.786 43.688,-69.85 ; 50.038,-61.214 45.466,-56.642 45.466,-34.96 50.454,-29.972 ; C1.1@55.892,-28.194 55.892,-28.944 54.864,-29.972 50.454,-29.972 ; 27.94,-69.85 29.718,-68.072 34.036,-68.072 35.814,-69.85 ; 35.814,-69.85 38.1,-67.564 ; 38.1,-67.564 41.402,-67.564 43.688,-69.85
  Top Layer w1.27: v4(39.878,-61.976) 49.784,-61.976
  Bottom Layer w1.27: P1.1@27.94,-45.72 38.1,-55.88 38.1,-60.198 v4(39.878,-61.976)
BOOT: PROG.5 Q11.3 Q15.2 R6.1 U1.25 | length 70.8
  Top Layer w0.381: R6.1@12.7,-41.16 v2(12.7,-39.624) ; v2(20.066,-58.166) 21.082,-59.182 Q11.3@21.082,-59.69 ; U1.25@24.27,-17.047 24.299,-17.018 v2(25.654,-17.018) ; Q15.2@29.53,-39.132 v2(29.53,-37.15)
  Bottom Layer w0.381: v2(20.066,-58.166) 12.7,-50.8 PROG.5@12.7,-46.99 12.7,-36.576 20.066,-29.21 ; v2(25.654,-17.018) 22.86,-17.018 20.066,-19.812 20.066,-29.21 ; v2(29.53,-37.15) 28.006,-37.15 20.066,-29.21
CONTROLLER_GND_1: "Hall In_1.5" "Hall Out_1.5" C9_1.1 Motor_1.5 Q7_1.2 Q8_1.2 Q9_1.2 R25_1.1 R26_1.1 R27_1.1 U3_1.3 U4_1.3 U5_1.3 | length 49.6
  Top Layer w0.381: Q7_1.2@5.522,-77.184 5.522,-79.674 R25_1.1@5.588,-79.74 ; Q8_1.2@12.38,-77.184 12.38,-79.686 R26_1.1@12.446,-79.752 ; Q9_1.2@19.238,-77.184 19.238,-79.686 R27_1.1@19.304,-79.752 ; Motor_1.5@25.4,-93.98 25.4,-91.948 24.892,-91.44 U5_1.3@24.892,-89.24 24.892,-88.138 25.4,-87.63 32.258,-87.63 32.766,-88.138 ; U4_1.3@32.766,-89.24 32.766,-88.138 ; U3_1.3@40.64,-89.256 40.64,-88.122 ; C9_1.1@46.99,-90.674 46.99,-88.122 46.482,-87.614 41.148,-87.614 40.64,-88.122 ; 32.766,-88.138 33.29,-87.614 40.132,-87.614 40.64,-88.122
  Top Layer w0.762: 17.78,-93.98 17.78,-86.36
  other v1: 2.54,-99.06 4.5,-99 6.5,-99 8.5,-99 10.5,-99 12.5,-99 14.5,-99 16.5,-99 18.5,-99 20.5,-99 22.5,-99 24.5,-99 26.5,-99 28.5,-99 30.5,-99 32.5,-99 34.5,-99 36.5,-99 38.5,-99 40.5,-99 42.5,-99 44.5,-99 46.5,-99 3.5,-97 5.5,-97 7.5,-97 9.5,-97 11.5,-97 13.5,-97 15.5,-97 17.5,-97 19.5,-97 21.5,-97 23.5,-97 25.5,-97 27.5,-97 29.5,-97 31.5,-97 33.5,-97 35.5,-97 37.5,-97 39.5,-97 41.5,-97 43.5,-97 45.5,-97 47.5,-97 2.5,-95 4.5,-95 14.5,-95 20.5,-95 22.5,-95 38.5,-95 40.5,-95 44.5,-95 3.5,-93 5.5,-93 11.5,-93 21.5,-93 23.5,-93 29.5,-93 31.5,-93 37.5,-93 39.5,-93 2.5,-91 4.5,-91 6.5,-91 8.5,-91 16.5,-91 20.5,-91 22.5,-91 28.5,-91 30.5,-91 36.5,-91 38.5,-91 44.5,-91 3.5,-89 5.5,-89 11.5,-89 19.5,-89 21.5,-89 29.5,-89 37.5,-89 2.5,-87 4.5,-87 20.5,-87 22.5,-87 24.5,-87 26.5,-87 28.5,-87 30.5,-87 32.5,-87 40.5,-87 3.5,-85 5.5,-85 7.5,-85 9.5,-85 11.5,-85 13.5,-85 19.5,-85 21.5,-85 23.5,-85 25.5,-85 27.5,-85 29.5,-85 31.5,-85 33.5,-85 35.5,-85 37.5,-85 39.5,-85 41.5,-85 43.5,-85 45.5,-85 47.5,-85 2.5,-83 4.5,-83 6.5,-83 8.5,-83 10.5,-83 14.5,-83 18.5,-83 20.5,-83 9.5,-81 15.5,-81 21.5,-81 2.5,-79 8.5,-79 14.5,-79 16.5,-79 7.5,-77 9.5,-77 15.5,-77 21.5,-77 2.5,-75 20.5,-75 5.5,-73 4.5,-71 6.5,-71 5.5,-69 2.5,-67 4.5,-67 6.5,-67 3.5,-65 5.5,-65
CONTROLLER_GND_2: "Hall In_2.5" "Hall Out_2.5" C9_2.1 Motor_2.5 Q7_2.2 Q8_2.2 Q9_2.2 R25_2.1 R26_2.1 R27_2.1 U3_2.3 U4_2.3 U5_2.3 | length 49.6
  Top Layer w0.381: Q7_2.2@57.927,-77.1 57.927,-79.59 R25_2.1@57.993,-79.656 ; Q8_2.2@64.785,-77.1 64.785,-79.602 R26_2.1@64.851,-79.668 ; Q9_2.2@71.643,-77.1 71.643,-79.602 R27_2.1@71.709,-79.668 ; Motor_2.5@76.2,-93.98 76.2,-91.948 75.692,-91.44 U5_2.3@75.692,-89.24 75.692,-88.138 76.2,-87.63 83.058,-87.63 83.566,-88.138 ; U4_2.3@83.566,-89.24 83.566,-88.138 ; U3_2.3@91.44,-89.256 91.44,-88.122 ; C9_2.1@97.79,-90.674 97.79,-88.122 97.282,-87.614 91.948,-87.614 91.44,-88.122 ; 83.566,-88.138 84.09,-87.614 90.932,-87.614 91.44,-88.122
  Top Layer w0.762: 68.58,-93.98 68.58,-86.36
  other v1: 50.5,-99 52.5,-99 54.5,-99 56.5,-99 58.5,-99 60.5,-99 62.5,-99 64.5,-99 66.5,-99 68.5,-99 70.5,-99 72.5,-99 74.5,-99 76.5,-99 78.5,-99 80.5,-99 82.5,-99 84.5,-99 86.5,-99 88.5,-99 90.5,-99 92.5,-99 94.5,-99 96.5,-99 98.5,-99 55.5,-97 57.5,-97 59.5,-97 61.5,-97 63.5,-97 65.5,-97 67.5,-97 69.5,-97 71.5,-97 73.5,-97 75.5,-97 77.5,-97 79.5,-97 81.5,-97 83.5,-97 85.5,-97 87.5,-97 89.5,-97 91.5,-97 93.5,-97 95.5,-97 97.5,-97 56.5,-95 62.5,-95 64.5,-95 70.5,-95 72.5,-95 80.5,-95 82.5,-95 84.5,-95 88.5,-95 90.5,-95 96.5,-95 98.5,-95 55.5,-93 71.5,-93 73.5,-93 79.5,-93 89.5,-93 95.5,-93 50.5,-91 52.5,-91 54.5,-91 56.5,-91 62.5,-91 64.5,-91 70.5,-91 72.5,-91 80.5,-91 88.5,-91 94.5,-91 51.5,-89 53.5,-89 55.5,-89 57.5,-89 59.5,-89 67.5,-89 69.5,-89 71.5,-89 73.5,-89 87.5,-89 52.5,-87 54.5,-87 56.5,-87 62.5,-87 64.5,-87 72.5,-87 74.5,-87 76.5,-87 78.5,-87 80.5,-87 82.5,-87 98.5,-87 51.5,-85 53.5,-85 55.5,-85 57.5,-85 59.5,-85 71.5,-85 73.5,-85 75.5,-85 77.5,-85 79.5,-85 81.5,-85 83.5,-85 85.5,-85 87.5,-85 89.5,-85 91.5,-85 93.5,-85 95.5,-85 97.5,-85 52.5,-83 54.5,-83 56.5,-83 58.5,-83 62.5,-83 64.5,-83 68.5,-83 70.5,-83 61.5,-81 50.5,-79 54.5,-79 60.5,-79 68.5,-79 51.5,-77 53.5,-77 61.5,-77 67.5,-77 50.5,-75 52.5,-75
DTR: Q11.2 R29.1 U7.28 | length 17.8
  Top Layer w0.254: v2(11.43,-52.832) 11.962,-53.364 U7.28@12.349,-53.364
  Top Layer w0.381: Q11.2@22.032,-61.69 v2(22.032,-59.248) 22.364,-58.916 R29.1@22.86,-58.916
  Bottom Layer w0.381: v2(11.43,-52.832) 17.846,-59.248 v2(22.032,-59.248)